# Altium PCB Time4CM4_SIT_module.PcbDoc
Units mm, origin at the board's own origin, x right, y up, seen from the top; angles counter-clockwise.
Board outline 11.4 x 15 mm, 4 copper layers (Top Layer, Int1 (GND), Int2 (PWR), Bottom Layer), stack 1.56 mm thick; 13 components, 16 nets, 71 pads, 34 vias.
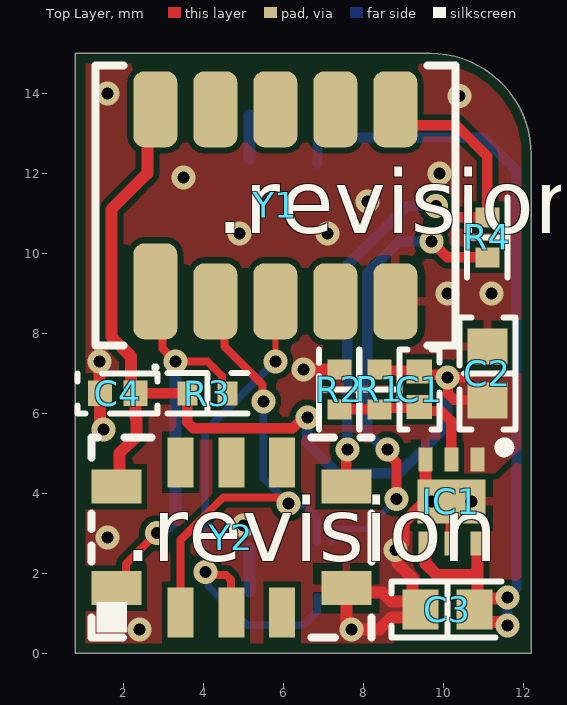
[diagram p0: Top Layer view]
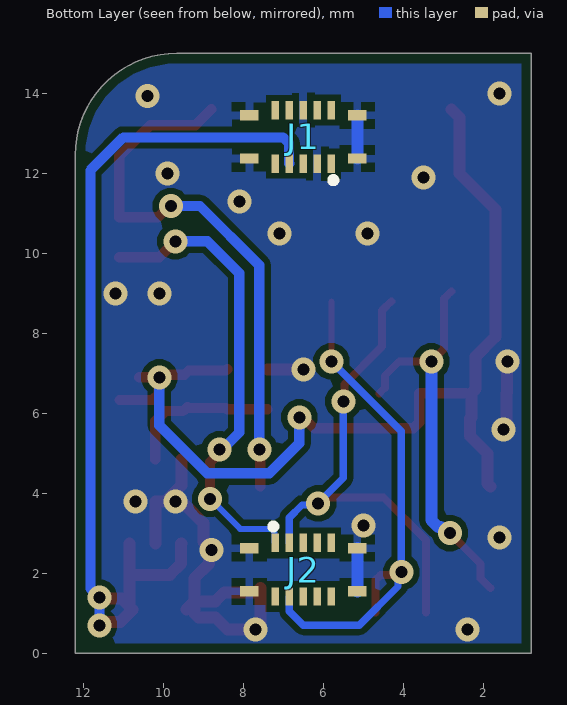
[diagram p1: Bottom Layer view, seen from below]

## Layer stack, top to bottom
Top Solder: solder mask 0.0254, SM-001, Dk 4
Top Layer: signal copper 0.035
Dielectric 1: prepreg 0.055, PP-017, Dk 4.3
Dielectric 2: prepreg 0.055, PP-017, Dk 4.3
Int1 (GND): signal copper 0.035
Dielectric 3: core 1.2, Core-039, Dk 4.8
Int2 (PWR): signal copper 0.035
Dielectric 4: prepreg 0.055, PP-017, Dk 4.3
Dielectric 5: prepreg 0.055, PP-017, Dk 4.3
Bottom Layer: signal copper 0.035
Bottom Solder: solder mask 0.0254, SM-001, Dk 4

## Board outline
0.8,0 0.8,15 9.66,15 cw(c9.66,12.46) 12.2,12.46 12.2,0

## Design rules (kind name [scope] priority, off if disabled: settings)
AcuteAngle [All] p1: minimum=3.50000000000000E+0001 checktracksonly=FALSE
BoardOutlineClearance "BoardOutlineClearance 1" [All] p1: gap=0.25 ignorepadtopadclearanceinfootprint=FALSE except(0: Arc-SplitContinuation Track-SplitContinuation SMDPad-SplitContinuation THPad-SplitContinuation Via-SplitContinuation Fill-SplitContinuation Poly-SplitContinuation Region-SplitContinuation Text-SplitContinuation) // Milling
BoardOutlineClearance "BoardOutlineClearance 2" [All] p2: gap=0.4 ignorepadtopadclearanceinfootprint=FALSE except(0: Arc-SplitContinuation Track-SplitContinuation SMDPad-SplitContinuation THPad-SplitContinuation Via-SplitContinuation Fill-SplitContinuation Poly-SplitContinuation Region-SplitContinuation Text-SplitContinuation) // V-Cut
Clearance "Clearance 3 Oz" [All] p1 off: gap=0.35 ignorepadtopadclearanceinfootprint=FALSE except(0.25: Arc-Hole Track-Hole SMDPad-Hole THPad-Hole Via-Hole Fill-Hole Poly-Hole Region-Hole Text-Hole)
Clearance "Clearance 2 Oz" [All] p2 off: gap=0.3 ignorepadtopadclearanceinfootprint=FALSE except(0.25: Arc-Hole Track-Hole SMDPad-Hole THPad-Hole Via-Hole Fill-Hole Poly-Hole Region-Hole Text-Hole)
Clearance "Clearance-1 1 Oz" [All] p3 off: gap=0.2 ignorepadtopadclearanceinfootprint=FALSE except(0.25: Arc-Hole Track-Hole SMDPad-Hole THPad-Hole Via-Hole Fill-Hole Poly-Hole Region-Hole Text-Hole) // Standart
Clearance "Clearance-2 1 Oz" [All] p4 off: gap=0.15 ignorepadtopadclearanceinfootprint=FALSE except(0.2: Arc-Fill Arc-Poly Track-Fill Track-Poly SMDPad-Fill SMDPad-Poly THPad-Fill THPad-Poly Via-Fill Via-Poly Fill-Fill Fill-Poly Poly-Poly; 0.25: Arc-Hole Track-Hole SMDPad-Hole THPad-Hole Via-Hole Fill-Hole Poly-Hole Region-Hole Text-Hole) // Advance
Clearance "Clearance-1 1/2 Oz" [All] p5 off: gap=0.125 ignorepadtopadclearanceinfootprint=FALSE except(0.2: Arc-Fill Arc-Poly Track-Fill Track-Poly SMDPad-SMDPad SMDPad-Fill SMDPad-Poly THPad-Fill THPad-Poly Via-Fill Via-Poly Fill-Fill Fill-Poly Poly-Poly Poly-Region Poly-Text; 0.25: Arc-Hole Track-Hole SMDPad-Hole THPad-Hole Via-Hole Fill-Hole Poly-Hole Region-Hole Text-Hole) // Standart
Clearance "Clearance-2 1/2 Oz" [All] p6: gap=0.1 ignorepadtopadclearanceinfootprint=FALSE except(0.15: Arc-Fill Arc-Poly Track-Fill Track-Poly SMDPad-SMDPad SMDPad-Fill SMDPad-Poly THPad-Fill THPad-Poly Via-Fill Via-Poly Fill-Fill Fill-Poly Poly-Poly Poly-Region Poly-Text; 0.25: Arc-Hole Track-Hole SMDPad-Hole THPad-Hole Via-Hole Fill-Hole Poly-Hole Region-Hole Text-Hole) // Advance
DiffPairsRouting "DiffPairsRouting 1 Oz" [All] p1: maxlimit=0.254 minlimit=0.2 mostfreqgap=0.254 toplayer_minwidth=0.2 toplayer_maxwidth=0.381 toplayer_prefwidth=0.381 midlayer1_minwidth=0.2 midlayer1_maxwidth=0.381 midlayer1_prefwidth=0.381 midlayer2_minwidth=0.2 midlayer2_maxwidth=0.381 midlayer2_prefwidth=0.381 bottomlayer_minwidth=0.2 bottomlayer_maxwidth=0.381 bottomlayer_prefwidth=0.381 maxuncoupledlength=12.7
DiffPairsRouting "DiffPairsRouting 1/2 Oz" [All] p2: maxlimit=0.254 minlimit=0.1 mostfreqgap=0.254 toplayer_minwidth=0.1 toplayer_maxwidth=0.381 toplayer_prefwidth=0.381 midlayer1_minwidth=0.1 midlayer1_maxwidth=0.381 midlayer1_prefwidth=0.381 midlayer2_minwidth=0.1 midlayer2_maxwidth=0.381 midlayer2_prefwidth=0.381 bottomlayer_minwidth=0.1 bottomlayer_maxwidth=0.381 bottomlayer_prefwidth=0.381 maxuncoupledlength=12.7
HoleSize "Minimum HoleSize" [IsPad] p1: absolutevalues=TRUE maxlimit=5.9 minlimit=0.6 maxpercent=80.000 minpercent=20.000
HoleSize "Minimum HoleSize VIA 1" [IsVia] p2: absolutevalues=TRUE maxlimit=5.9 minlimit=0.3 maxpercent=80.000 minpercent=20.000 // Standart
HoleSize "Minimum HoleSize VIA 2" [IsVia] p3: absolutevalues=TRUE maxlimit=5.9 minlimit=0.2 maxpercent=80.000 minpercent=20.000 // Advance
HoleToHoleClearance Hole2HoleClearance [All] p1: gap=0.25 allowstackedmicrovias=FALSE
MinimumAnnularRing "Minimum AR VIA Standart" [IsVia] p1: minimumring=0.15
MinimumAnnularRing "Minimum AR PAD Standart" [IsPAD] p2: minimumring=0.2
MinimumAnnularRing "Minimum AR VIA Advance" [IsVia] p3: minimumring=0.1
MinimumAnnularRing "Minimum AR PAD Advance" [IsPAD] p4: minimumring=0.15
MinimumSolderMaskSliver "SolderMask Bridge Standart" [All] p1: minsoldermaskwidth=0.15 // All Masks
MinimumSolderMaskSliver "SolderMask Bridge Advance" [All] p2: minsoldermaskwidth=0.1 // Mask LDI
PlaneClearance "PlaneClearance 3 Oz" [All] p1: clearance=0.35
PlaneClearance "PlaneClearance 2 Oz" [All] p2: clearance=0.3
PlaneClearance "PlaneClearance 1 Oz" [All] p3: clearance=0.2
PlaneClearance "PlaneClearance-1 1/2 Oz" [All] p4: clearance=0.2 // Standart
PlaneClearance "PlaneClearance-2 1/2 Oz" [All] p5: clearance=0.15 // Advance
PlaneConnect "TermalConnect 3 Oz" [All] p1: planeconnectstyle=Relief reliefexpansion=0.2 reliefentries=4 reliefconductorwidth=0.35 reliefairgap=0.35 // Standart
PlaneConnect "TermalConnect 2 Oz" [All] p2: planeconnectstyle=Relief reliefexpansion=0.2 reliefentries=4 reliefconductorwidth=0.3 reliefairgap=0.3 // Standart
PlaneConnect "TermalConnect-1 1 Oz" [All] p3: planeconnectstyle=Relief reliefexpansion=0.2 reliefentries=4 reliefconductorwidth=0.2 reliefairgap=0.2 // Standart
PlaneConnect "TermalConnect-2 1 Oz" [All] p4: pad.planeconnectstyle=Relief pad.reliefexpansion=0.15 pad.reliefentries=4 pad.reliefconductorwidth=0.2 pad.reliefairgap=0.2 via.planeconnectstyle=Direct via.reliefexpansion=0.15 via.reliefentries=4 via.reliefconductorwidth=0.15 via.reliefairgap=0.15 // Advance
PlaneConnect "TermalConnect-1 1/2 Oz" [All] p5: planeconnectstyle=Relief reliefexpansion=0.2 reliefentries=4 reliefconductorwidth=0.2 reliefairgap=0.2 // Standart
PlaneConnect "TermalConnect-2 1/2 Oz" [All] p6: pad.planeconnectstyle=Relief pad.reliefexpansion=0.15 pad.reliefentries=4 pad.reliefconductorwidth=0.15 pad.reliefairgap=0.15 via.planeconnectstyle=Direct via.reliefexpansion=0.15 via.reliefentries=4 via.reliefconductorwidth=0.15 via.reliefairgap=0.15 // Advance
PolygonConnect "PolygonConnect 3 Oz" [All] p1 off: thpad.connectstyle=Relief thpad.reliefconductorwidth=0.35 thpad.reliefentries=4 thpad.polygonreliefangle="90 Angle" thpad.airgapwidth=0.35 smdpad.connectstyle=Relief smdpad.reliefconductorwidth=0.35 smdpad.reliefentries=4 smdpad.polygonreliefangle="90 Angle" smdpad.airgapwidth=0.35 via.connectstyle=Direct via.reliefconductorwidth=0.254 via.reliefentries=4 via.polygonreliefangle="90 Angle" via.airgapwidth=0.254
PolygonConnect "PolygonConnect 2 Oz" [All] p2 off: thpad.connectstyle=Relief thpad.reliefconductorwidth=0.3 thpad.reliefentries=4 thpad.polygonreliefangle="90 Angle" thpad.airgapwidth=0.3 smdpad.connectstyle=Relief smdpad.reliefconductorwidth=0.3 smdpad.reliefentries=4 smdpad.polygonreliefangle="90 Angle" smdpad.airgapwidth=0.3 via.connectstyle=Direct via.reliefconductorwidth=0.254 via.reliefentries=4 via.polygonreliefangle="90 Angle" via.airgapwidth=0.254
PolygonConnect "PolygonConnect-1 1 Oz" [All] p3 off: thpad.connectstyle=Relief thpad.reliefconductorwidth=0.2 thpad.reliefentries=4 thpad.polygonreliefangle="90 Angle" thpad.airgapwidth=0.2 smdpad.connectstyle=Relief smdpad.reliefconductorwidth=0.2 smdpad.reliefentries=4 smdpad.polygonreliefangle="90 Angle" smdpad.airgapwidth=0.2 via.connectstyle=Direct via.reliefconductorwidth=0.254 via.reliefentries=4 via.polygonreliefangle="90 Angle" via.airgapwidth=0.254 // Standart
PolygonConnect "PolygonConnect-2 1 Oz" [All] p4 off: thpad.connectstyle=Relief thpad.reliefconductorwidth=0.15 thpad.reliefentries=4 thpad.polygonreliefangle="90 Angle" thpad.airgapwidth=0.15 smdpad.connectstyle=Relief smdpad.reliefconductorwidth=0.15 smdpad.reliefentries=4 smdpad.polygonreliefangle="90 Angle" smdpad.airgapwidth=0.15 via.connectstyle=Direct via.reliefconductorwidth=0.254 via.reliefentries=4 via.polygonreliefangle="90 Angle" via.airgapwidth=0.254 // Advance
PolygonConnect "PolygonConnect-1 1/2 Oz" [All] p5: thpad.connectstyle=Relief thpad.reliefconductorwidth=0.15 thpad.reliefentries=4 thpad.polygonreliefangle="90 Angle" thpad.airgapwidth=0.2 smdpad.connectstyle=Relief smdpad.reliefconductorwidth=0.2 smdpad.reliefentries=4 smdpad.polygonreliefangle="90 Angle" smdpad.airgapwidth=0.2 via.connectstyle=Direct via.reliefconductorwidth=0.254 via.reliefentries=4 via.polygonreliefangle="90 Angle" via.airgapwidth=0.254 // Standart
PolygonConnect "PolygonConnect-2 1/2 Oz" [All] p6: thpad.connectstyle=Relief thpad.reliefconductorwidth=0.125 thpad.reliefentries=4 thpad.polygonreliefangle="90 Angle" thpad.airgapwidth=0.15 smdpad.connectstyle=Relief smdpad.reliefconductorwidth=0.125 smdpad.reliefentries=4 smdpad.polygonreliefangle="90 Angle" smdpad.airgapwidth=0.15 via.connectstyle=Direct via.reliefconductorwidth=0.254 via.reliefentries=4 via.polygonreliefangle="90 Angle" via.airgapwidth=0.254 // Advance
RoutingCorners [All] p1 off: cornerstyle=45-Degree minsetback=2.54 maxsetback=2.54
RoutingVias [All] p1: holewidth=0.3 width=0.6 viastyle="Through Hole" minholewidth=0.2 minwidth=0.4 maxholewidth=0.5 maxwidth=1
SilkToSilkClearance Silk2SilkClearance [All] p1 off: silktosilkclearance=0.15
SilkToSolderMaskClearance Silk2SolderMaskClearance [IsPad] p1 off: minsilkscreentomaskgap=0.15 clearancetoexposedcopper=TRUE
SolderMaskExpansion SolderMaskExpansion-1 [All] p1: expansion=0.05 istentingtop=FALSE // Standart
SolderMaskExpansion "SolderMaskExpansion LDI" [All] p2: expansion=0.025 istentingtop=FALSE // Advance
UnRoutedNet [All] p1: checkbadconnections=TRUE
Width "Width 3 Oz" [All] p1 off: maxlimit=10 minlimit=0.35 preferedwidth=0.4 checkconnectedcopper=TRUE
Width "Width 2 Oz" [All] p2 off: maxlimit=10 minlimit=0.3 preferedwidth=0.35 minimp=50.000000 maximp=50.000000 favimp=50.000000 checkconnectedcopper=TRUE
Width "Width 1 Oz" [All] p3 off: maxlimit=10 minlimit=0.15 preferedwidth=0.2 checkconnectedcopper=TRUE
Width "Width 1/2 Oz" [All] p4: maxlimit=0.5 minlimit=0.1 preferedwidth=0.125 checkconnectedcopper=TRUE
20 further rules are at their usual default settings.

## Components (designator, comment, footprint, x,y, rotation, side; value= is the part's Value field where it differs from the comment)
C1 "10 pF NC" "CAP 0402_1005" 9.4,6.6 r90 top
C2 "10 µF" "CAP 0603_1608" 11.1,7 r270 top
C3 "10 µF" "CAP 0603_1608" 10.1,1.1 r0 top
C4 "0.1 µF" "CAP 0402_1005" 1.86,6.5 r0 top
IC1 "TLV76701DRVR" SON65P200X200X80-7N 10.2,3.8 r270 top
J1 "BM23FR0.8-10DP-0.35V(895)" BM23FR0810DP035V895 6.5,12.91 r0 bottom locked
J2 "BM23FR0.8-10DP-0.35V(895)" BM23FR0810DP035V895 6.5,2.09 r180 bottom locked
R1 "160 kOhms" "YAGEO RES 0402_1005" 8.4,6.6 r90 top
R2 "499 kOhms" "YAGEO RES 0402_1005" 7.4,6.6 r270 top
R3 "100 kOhms" "YAGEO RES 0402_1005" 4.1,6.5 r0 top
R4 "0 Ohms" "YAGEO RES 0402_1005" 11.1,10.4 r90 top
Y1 "SiT5711A-KW-0001" EMERALD_9070_10PINS_2022 5.8,11.2 r90 top
Y2 "SIT5503AB-WW-33E0-10.00000" Ceramic_QFN_7050_10pins 4.7,2.9 r90 top

## Footprints (in the part's own frame and the unit in brackets; to place one, negate y for a bottom-side part, rotate by r counter-clockwise, add the part's x,y. Pads: shape width x height; smd on the part's side, far side on the other; paste and mask are expansions set on the pad)
BM23FR0810DP035V895 [mm]
  rect 0.18x0.46 smd: 1(-0.7,0.67) 2(-0.7,-0.67) 3(-0.35,0.67) 4(-0.35,-0.67) 5(0,0.67) 6(0,-0.67) 7(0.35,0.67) 8(0.35,-0.67) 9(0.7,0.67) 10(0.7,-0.67)
  rect 0.47x0.26 smd: MP1(-1.35,0.54) MP2(-1.35,-0.54) MP3(1.35,0.54) MP4(1.35,-0.54)
  silkscreen extent -0.8,1.03 -0.7,1.13, body extent -1.73,-0.88 1.73,0.88, height 0.74
"CAP 0402_1005" [mm] "Chip Capacitor, 2-Leads, Body 1.02x0.51mm, IPC Medium Density"
  rect 0.6x0.64 smd: 1(-0.44,0) 2(0.44,0)
  silkscreen extent -1,-0.5 1,0.5, body extent -0.5,-0.26 0.5,0.26, height 0.52
"CAP 0603_1608" [mm] "Chip Capacitor, 2-Leads, Body 1.60x0.80mm, IPC Medium Density"
  rect 0.9x1 smd: 1(-0.675,0) 2(0.675,0)
  silkscreen extent -1.4,-0.7 1.4,0.7, body extent -0.8,-0.41 0.8,0.41, height 0.82
Ceramic_QFN_7050_10pins [mm]
  rect 0.85x1.25 smd: 1(-1.27,2.875) 5(-1.27,-2.875) 6(1.27,-2.875) 10(1.27,2.875)
  rect 1.25x0.65 smd: 2(-1.875,1.27) 3(-1.875,0) 4(-1.875,-1.27) 7(1.875,-1.27) 8(1.875,0) 9(1.875,1.27)
  silkscreen extent -2.5,-3.5 2.5,3.5, body extent -2.5,-3.5 2.5,3.5, height 2.05
EMERALD_9070_10PINS_2022 [mm]
  rrect50% 2.4x1.1 smd: 1(-2.15,3)
  rrect50% 1.9x1.1 smd: 2(-2.4,1.5) 3(-2.4,0) 4(-2.4,-1.5) 5(-2.4,-3) 6(2.4,-3) 7(2.4,-1.5) 8(2.4,0) 9(2.4,1.5) 10(2.4,3)
  silkscreen extent -4.1,-4.5 3.5,4.5, body extent -3.5,-4.5 3.5,4.5, height 5.68
SON65P200X200X80-7N [mm]
  rect 0.6x0.35 smd: 1(-1.05,0.65) 2(-1.05,0) 3(-1.05,-0.65) 4(1.05,-0.65) 5(1.05,0) 6(1.05,0.65)
  rect 1.1x1.7 smd: 7(0,0)
  silkscreen extent -1.47,1.2 -1.23,1.45, body extent -1.05,-1 1.05,1, height 0.8
"YAGEO RES 0402_1005" [mm] "Chip Resistor, 2-Leads, Body 1.0x0.5mm"
  rect 0.5x0.6 smd: 1(-0.5,0) 2(0.5,0)
  silkscreen extent -1,-0.51 1,0.51, body extent -0.5,-0.25 0.5,0.25, height 0.35

## Part data
C1: library part CC0402KRNPO9BN100, "CAP CER 10PF 50V C0G/NPO 0402", Capacitance="10 pF", Device Package="0402 (1005 Metric)", Manufacturer=Yageo, Operating Temperature="-55°C ~ 125°C", Supplier Part Number 1=13-CC0402KRNPO9BN100CT-ND, Temperature Coefficient="C0G, NP0", Tolerance=±10%, Voltage - Rated=50V, Applications="General Purpose", componentlink1description=Datasheet, componentlink1url=https://www.yageo.com/upload/media/product/productsearch/datasheet/mlcc/UPY-GP_NP0_16V-to-50V_18.pdf, componentlink2description="DigiKey Link", componentlink2url=https://www.digikey.com/en/products/detail/yageo/CC0402KRNPO9BN100/11489535, lastupdated="09.02.2024 20:03:43", Lifecycle Status=Active, Minimum Order=10, Mounting Type="Surface Mount, MLCC", Package / Case="0402 (1005 Metric)", packaging=CutTape, Part Number=CC0402KRNPO9BN100, Part Status=Active, partid=52087, Price=0.01, series=CC, Size / Dimension="0.039\" L x 0.020\" W (1.00mm x 0.50mm)", Supplier 1=DigiKey, Thickness (Max)="0.022\" (0.55mm)"
C2 C3: library part CC0603MPX5R5BB106, "CAP CER 10UF 6.3V X5R 0603", Device Package="0603 (1608 Metric)", Manufacturer=Yageo, Operating Temperature="-55°C ~ 85°C", Supplier Part Number 1=13-CC0603MPX5R5BB106CT-ND, Temperature Coefficient=X5R, Tolerance=±20%, Voltage - Rated=6.3V, Applications="General Purpose", Capacitance="10 µF", componentlink1description=Datasheet, componentlink1url=https://www.yageo.com/upload/media/product/productsearch/datasheet/mlcc/UPY-GPHC_X5R_4V-to-50V_26.pdf, componentlink2description="DigiKey Link", componentlink2url=https://www.digikey.com/en/products/detail/yageo/CC0603MPX5R5BB106/13899929, lastupdated="09.02.2024 20:09:51", Lifecycle Status=Active, Minimum Order=10, Mounting Type="Surface Mount, MLCC", Package / Case="0603 (1608 Metric)", packaging=TapeAndReel, Part Number=CC0603MPX5R5BB106, Part Status=Active, partid=42060, Price=0.03, series=CC, Size / Dimension="0.063\" L x 0.031\" W (1.60mm x 0.80mm)", Supplier 1=DigiKey, Thickness (Max)="0.037\" (0.95mm)"
C4: library part CC0402KRX7R5BB104, "CAP CER 0.1UF 6.3V X7R 0402", Device Package="0402 (1005 Metric)", Manufacturer=Yageo, Operating Temperature="-55°C ~ 125°C", Supplier Part Number 1=311-1701-1-ND, Temperature Coefficient=X7R, Tolerance=±10%, Voltage - Rated=6.3V, Applications="General Purpose", Capacitance="0.1 µF", componentlink1description=Datasheet, componentlink1url=https://www.yageo.com/upload/media/product/productsearch/datasheet/mlcc/UPY-GPHC_X7R_6.3V-to-50V_18.pdf, componentlink2description="DigiKey Link", componentlink2url=https://www.digikey.com/en/products/detail/yageo/CC0402KRX7R5BB104/5195110, lastupdated="09.02.2024 20:04:20", Lifecycle Status=Active, Minimum Order=10, Mounting Type="Surface Mount, MLCC", Package / Case="0402 (1005 Metric)", packaging=TapeAndReel, Part Number=CC0402KRX7R5BB104, Part Status=Active, partid=12548, Price=0.01, series=CC, Size / Dimension="0.039\" L x 0.020\" W (1.00mm x 0.50mm)", Supplier 1=DigiKey, Thickness (Max)="0.022\" (0.55mm)"
IC1: "IC REG LINEAR POS ADJ 1A 6WSON", Manufacturer_Name="Texas Instruments", Mouser Part Number=595-TLV76701DRVR, Arrow Part Number=TLV76701DRVR, Arrow Price/Stock=https://www.arrow.com/en/products/tlv76701drvr/texas-instruments?region=nac, Datasheet Link=http://www.ti.com/lit/gpn/TLV767, Height=0.8mm, Manufacturer_Part_Number=TLV76701DRVR, Mouser Price/Stock=https://www.mouser.co.uk/ProductDetail/Texas-Instruments/TLV76701DRVR?qs=l7cgNqFNU1h4nW14BHdGSQ%3D%3D
J1 J2: library part BM23FR0.8-10DS-0.35V_895_, "Connector", Manufacturer_Name=Hirose, Manufacturer_Part_Number=BM23FR0.8-10DS-0.35V(895), Mouser Part Number=798-3FR0810DS035V895, Datasheet Link=https://componentsearchengine.com/Datasheets/1/BM23FR0.8-10DS-0.35V(895).pdf, Height=0.9mm, Mouser Price/Stock=https://www.mouser.co.uk/ProductDetail/Hirose-Connector/BM23FR08-10DS-035V895/?qs=YCa%2FAAYMW01IXWgIGURT8A%3D%3D
R1: library part RC0402FR-07160KL, "RES 160K OHM 1% 1/16W 0402", Device Package="0402 (1005 Metric)", Manufacturer=Yageo, Operating Temperature="-55°C ~ 155°C", Power (Watts)="0.063W, 1/16W", Supplier Device Package=0402, Supplier Part Number 1=YAG2996CT-ND, Temperature Coefficient=±100ppm/°C, Tolerance=±1%, componentlink1description=Datasheet, componentlink1url=https://www.yageo.com/upload/media/product/productsearch/datasheet/rchip/PYu-RC_Group_51_RoHS_L_10.pdf, componentlink2description="DigiKey Link", componentlink2url=https://www.digikey.com/en/products/detail/yageo/RC0402FR-07160KL/5280856, Composition="Thick Film", Features="Moisture Resistant", Height - Seated (Max)="0.016\" (0.40mm)", lastupdated="25.07.2024 9:18:19", Lifecycle Status=Active, Minimum Order=1, Number of Terminations=2, Package / Case="0402 (1005 Metric)", packaging=CutTape, Part Number=RC0402FR-07160KL, Part Status=Active, partid=2582, Price=0.01, Resistance="160 kOhms", series=RC_L, Size / Dimension="0.039\" L x 0.020\" W (1.00mm x 0.50mm)", Supplier 1=DigiKey
R2: library part RC0402FR-07499KL, "RES 499K OHM 1% 1/16W 0402", Device Package="0402 (1005 Metric)", Manufacturer=Yageo, Operating Temperature="-55°C ~ 155°C", Power (Watts)="0.063W, 1/16W", Supplier Device Package=0402, Supplier Part Number 1=311-499KLRCT-ND, Temperature Coefficient=±100ppm/°C, Tolerance=±1%, componentlink1description=Datasheet, componentlink1url=https://www.yageo.com/upload/media/product/productsearch/datasheet/rchip/PYu-RC_Group_51_RoHS_L_10.pdf, componentlink2description="DigiKey Link", componentlink2url=https://www.digikey.com/en/products/detail/yageo/RC0402FR-07499KL/726622, Composition="Thick Film", Features="Moisture Resistant", Height - Seated (Max)="0.016\" (0.40mm)", lastupdated="25.07.2024 9:18:19", Lifecycle Status=Active, Minimum Order=1, Number of Terminations=2, Package / Case="0402 (1005 Metric)", packaging=CutTape, Part Number=RC0402FR-07499KL, Part Status=Active, partid=2647, Price=0.01, Resistance="499 kOhms", series=RC_L, Size / Dimension="0.039\" L x 0.020\" W (1.00mm x 0.50mm)", Supplier 1=DigiKey
R3: library part RC0402FR-07100KL, "RES 100K OHM 1% 1/16W 0402", Device Package="0402 (1005 Metric)", Manufacturer=Yageo, Operating Temperature="-55°C ~ 155°C", Power (Watts)="0.063W, 1/16W", Supplier Device Package=0402, Supplier Part Number 1=311-100KLRCT-ND, Temperature Coefficient=±100ppm/°C, Tolerance=±1%, componentlink1description=Datasheet, componentlink1url=https://www.yageo.com/upload/media/product/productsearch/datasheet/rchip/PYu-RC_Group_51_RoHS_L_10.pdf, componentlink2description="DigiKey Link", componentlink2url=https://www.digikey.com/en/products/detail/yageo/RC0402FR-07100KL/726526, Composition="Thick Film", Features="Moisture Resistant", Height - Seated (Max)="0.016\" (0.40mm)", lastupdated="25.07.2024 9:18:11", Lifecycle Status=Active, Minimum Order=1, Number of Terminations=2, Package / Case="0402 (1005 Metric)", packaging=CutTape, Part Number=RC0402FR-07100KL, Part Status=Active, partid=17595, Price=0.01, Resistance="100 kOhms", series=RC_L, Size / Dimension="0.039\" L x 0.020\" W (1.00mm x 0.50mm)", Supplier 1=DigiKey
R4: library part RC0402FR-070RL, "RES 0 OHM JUMPER 1/16W 0402", Device Package="0402 (1005 Metric)", Manufacturer=Yageo, Operating Temperature="-55°C ~ 155°C", Power (Watts)="0.063W, 1/16W", Supplier Device Package=0402, Supplier Part Number 1=311-0.0LRCT-ND, Tolerance=Jumper, componentlink1description=Datasheet, componentlink1url=https://www.yageo.com/upload/media/product/productsearch/datasheet/rchip/PYu-RC_Group_51_RoHS_L_10.pdf, componentlink2description="DigiKey Link", componentlink2url=https://www.digikey.com/en/products/detail/yageo/RC0402FR-070RL/2827570, Composition="Thick Film", Features="Moisture Resistant", Height - Seated (Max)="0.016\" (0.40mm)", lastupdated="25.07.2024 9:18:11", Lifecycle Status=Active, Minimum Order=1, Number of Terminations=2, Package / Case="0402 (1005 Metric)", packaging=CutTape, Part Number=RC0402FR-070RL, Part Status=Active, partid=17630, Price=0.01, Resistance="0 Ohms", series=RC_L, Size / Dimension="0.039\" L x 0.020\" W (1.00mm x 0.50mm)", Supplier 1=DigiKey
Y1 Y2: "Crystal or Oscillator", Manufacturer_Name=SiTime
  Y1: Datasheet Link=https://www.sitime.com/support/resource-library/datasheets/sit5711-datasheet, Height=6.19mm, Manufacturer_Part_Number=SiT5711A-KW-0001
  Y2: Height=2.2mm, Manufacturer_Part_Number=SIT5503AB-WW-33E0-10.00000

## Via types
v1: diameter 0.6, hole 0.3, Top Layer to Bottom Layer, tented both sides, 34 vias

## Nets (pads, with @x,y where several pads share a name; then routed paths per layer and width w, separated by ;. In a path a pad name is that pad's centre, name@x,y a point inside that pad or via, vN(x,y) a via of type N, cw(c..) or ccw(c..) an arc to the next point about the centre after c; other vN are vias at no path point)
1V8: J1.5
3V3: J1.1
5V: C3.2 IC1.4 IC1.6 J1.7 | length 22.8
  Top Layer w0.3: IC1.4 9.556,2.744 9.556,2.244 9.838,1.963 10.85,1.963 ; IC1.6 10.85,1.963 ; v1(11.6,0.7) 11.573,0.7 11.489,0.784 11.075,0.784 10.775,1.084 C3.2 C3.2@10.85,1.175 ; v1(11.6,1.4) 11.573,1.4 11.539,1.366 11.041,1.366 C3.2@10.85,1.175 ; C3.2@10.85,1.175 10.85,1.963
  Bottom Layer w0.25: J1.7 6.86,12.25 6.86,12.754 7.006,12.9 11,12.9 11.825,12.075 11.825,1.625 v1(11.6,1.4) v1(11.6,0.7)
10MHz: J2.1 R4.1 | length 11.7
  Top Layer w0.254: v1(8.6,5.1) 8.6,5.009 8.831,4.778 v1(8.831,3.864) ; v1(9.7,10.3) 10.1,9.9 R4.1
  Bottom Layer w0.15: J2.1 7.215,2.775 7.215,3.024 7.303,3.112 8.08,3.112 v1(8.831,3.864)
  Bottom Layer w0.254: v1(8.6,5.1) 8.522,5.1 8.1,5.522 8.1,9.5 8.9,10.3 v1(9.7,10.3)
GND: C2.1 C3.1 C4.1 IC1.3 IC1.5 IC1.7 J1.3 J1.6 J1.MP1 J1.MP2 J1.MP3 J1.MP4 J2.MP1 J2.MP2 J2.MP3 J2.MP4 R2.1 Y1.5 Y2.5 | length 15.9
  Top Layer w0.3: v1(1.4,7.3) 1.406,7.294 1.406,6.514 C4.1 1.42,5.761 1.5,5.681 v1(1.5,5.6) ; v1(6.5,7.1) R2.1 ; IC1.3 9.55,4.2 9.825,3.925 9.95,3.8 IC1.7 IC1.5 ; v1(9.7,3.8) 9.6,3.7 9.445,3.7 9,3.255 9,2.781 v1(8.8,2.581) 8.857,2.524 8.857,2.243 9.226,1.874 C3.1@9.226,1.299 ; C3.1@9.226,1.299 8.701,1.299 8.474,1.526 7.679,1.526 Y2.5 7.575,0.752 7.7,0.627 v1(7.7,0.6) 8.4,0.6 8.701,0.901 9.125,0.901 9.226,1.001 C3.1@9.226,1.299 ; C3.1@9.226,1.299 C3.1 C3.1@9.226,1.299
  Bottom Layer w0.3: J2.MP4 J2.MP3 ; J1.MP1 J1.MP2
  other v1: 2.4,0.6 1.6,2.9 5,3.2 10.7,3.8 10.1,9 11.2,9 4.9,10.5 7.1,10.5 8.1,11.3 3.5,11.9 9.9,12 10.4,13.933 1.6,14
GPIO_1: J1.8
GPIO_2: J1.9
GPIO_3: J1.10
NetC1_1: C1.1 IC1.2 R1.1 R2.2 | length 3.9
  Top Layer w0.254: R2.2 R1.1 8.43,6.13 9.37,6.13 C1.1 9.505,6.055 9.945,6.055 10.2,5.8 IC1.2
NetJ1_2: J1.2
NetJ1_4: J1.4
NetR3_2: R3.2 Y1.1 Y2.1 | length 10.1
  Top Layer w0.2: Y2.1 2.07,1.875 2.07,2.238 v1(2.837,3.004) ; Y1.1 2.978,8.872 2.978,7.622 v1(3.3,7.3) 4.1,7.3 4.463,6.937 4.463,6.637 R3.2
  Bottom Layer w0.3: v1(2.837,3.004) 2.918,3.004 3.068,3.154 3.124,3.154 3.3,3.33 v1(3.3,7.3)
NetR4_2: R4.2 Y1.6 Y2.6 | length 14.1
  Top Layer w0.254: Y2.6 7.575,5.075 v1(7.6,5.1) ; Y1.6 9.2,13.2 10.328,13.2 11.1,12.428 R4.2 10.134,10.9 9.852,11.182 v1(9.813,11.182)
  Bottom Layer w0.254: v1(7.6,5.1) 7.6,9.7 9.082,11.182 v1(9.813,11.182)
SCL: J2.4 Y1.3 Y2.3 | length 13.1
  Top Layer w0.15: v1(5.8,7.3) Y1.3
  Top Layer w0.2: v1(4.05,2.03) 4.127,1.954 4.571,1.954 4.692,1.833 4.692,1.033 Y2.3
  Bottom Layer w0.18: v1(5.8,7.3) 4.05,5.55 v1(4.05,2.03) 4.131,1.949 4.131,1.669 5.1,0.7 6.5,0.7 6.85,1.05 J2.4
SDA: J2.3 Y1.2 Y2.2 | length 12.3
  Top Layer w0.2: Y2.2 3.43,2.83 4.5,3.9 5.872,3.9 6.022,3.75 v1(6.13,3.75) ; Y1.2 4.532,8.568 4.532,7.668 5.476,6.724 5.476,6.324 v1(5.5,6.3)
  Bottom Layer w0.18: v1(5.5,6.3) 5.5,4.38 v1(6.13,3.75) 6.171,3.709 6.532,3.709 6.85,3.392 J2.3
VDD: C1.2 C2.2 C4.2 IC1.1 R1.2 R3.1 Y1.10 Y2.10 | length 25.3
  Top Layer w0.254: C4.2@2.45,6.5 R3.1 3.6,5.776 3.749,5.627 6.233,5.627 6.506,5.9 v1(6.6,5.9) ; R1.2 8.43,7.07 9.37,7.07 9.474,6.966 10.034,6.966 v1(10.1,6.9) ; 10.6,6.9 v1(10.1,6.9) ; C2.2@11.09,6.335 10.269,6.335 10.12,6.484 10.12,6.88 v1(10.1,6.9)
  Top Layer w0.3: Y2.10 1.9,4.245 1.9,5 2.33,5.43 2.33,5.871 2.3,5.901 C4.2 2.193,6.607 2.193,7.42 1.7,7.913 1.7,11.1 2.6,12 2.6,13.4 Y1.10
  Bottom Layer w0.254: v1(6.6,5.9) 6.6,5.248 7.348,4.5 8.9,4.5 10.102,5.702 10.102,6.898 v1(10.1,6.9)
pads on no net: J2.2 J2.5 J2.6 J2.7 J2.8 J2.9 J2.10 Y1.4 Y1.7 Y1.8 Y1.9 Y2.4 Y2.7 Y2.8 Y2.9

## Polygon pours and split planes (outlines as drawn)
GND on Top Layer "NONET_L-01_P-001" (solid, pour order 2): 0,15 13,15 13,0 0,0
VDD on Top Layer "NONET_L-01_P-001" (solid, pour order 0): 11.3,4.5 12,5.2 12,7 10.4,7 10.4,4.5
GND on Bottom Layer "NONET_L-01_P-001" (solid, pour order 1): 0,15 13,15 13,0 0,0

## Silkscreen, mask and mechanical layers (free items; w line width, h text height)
Top Overlay:
  rectangle: 1.33,0.526 2.092,1.288
  text ".revision" at 4.323,10.5 h1.6
  text ".revision" at 2.023,2.3 h1.6
OUTLINE:
  the board outline again, w0.102